# Altium PCB DriverV2.0.PcbDoc
Units mil, origin at the board's own origin, x right, y up, seen from the top; angles counter-clockwise.
Board outline 2047.24 x 1968.5 mil, 4 copper layers (Top, Gnd, Signal, Bottom), stack 58.4 mil thick; 73 components, 33 nets, 277 pads, 509 vias.
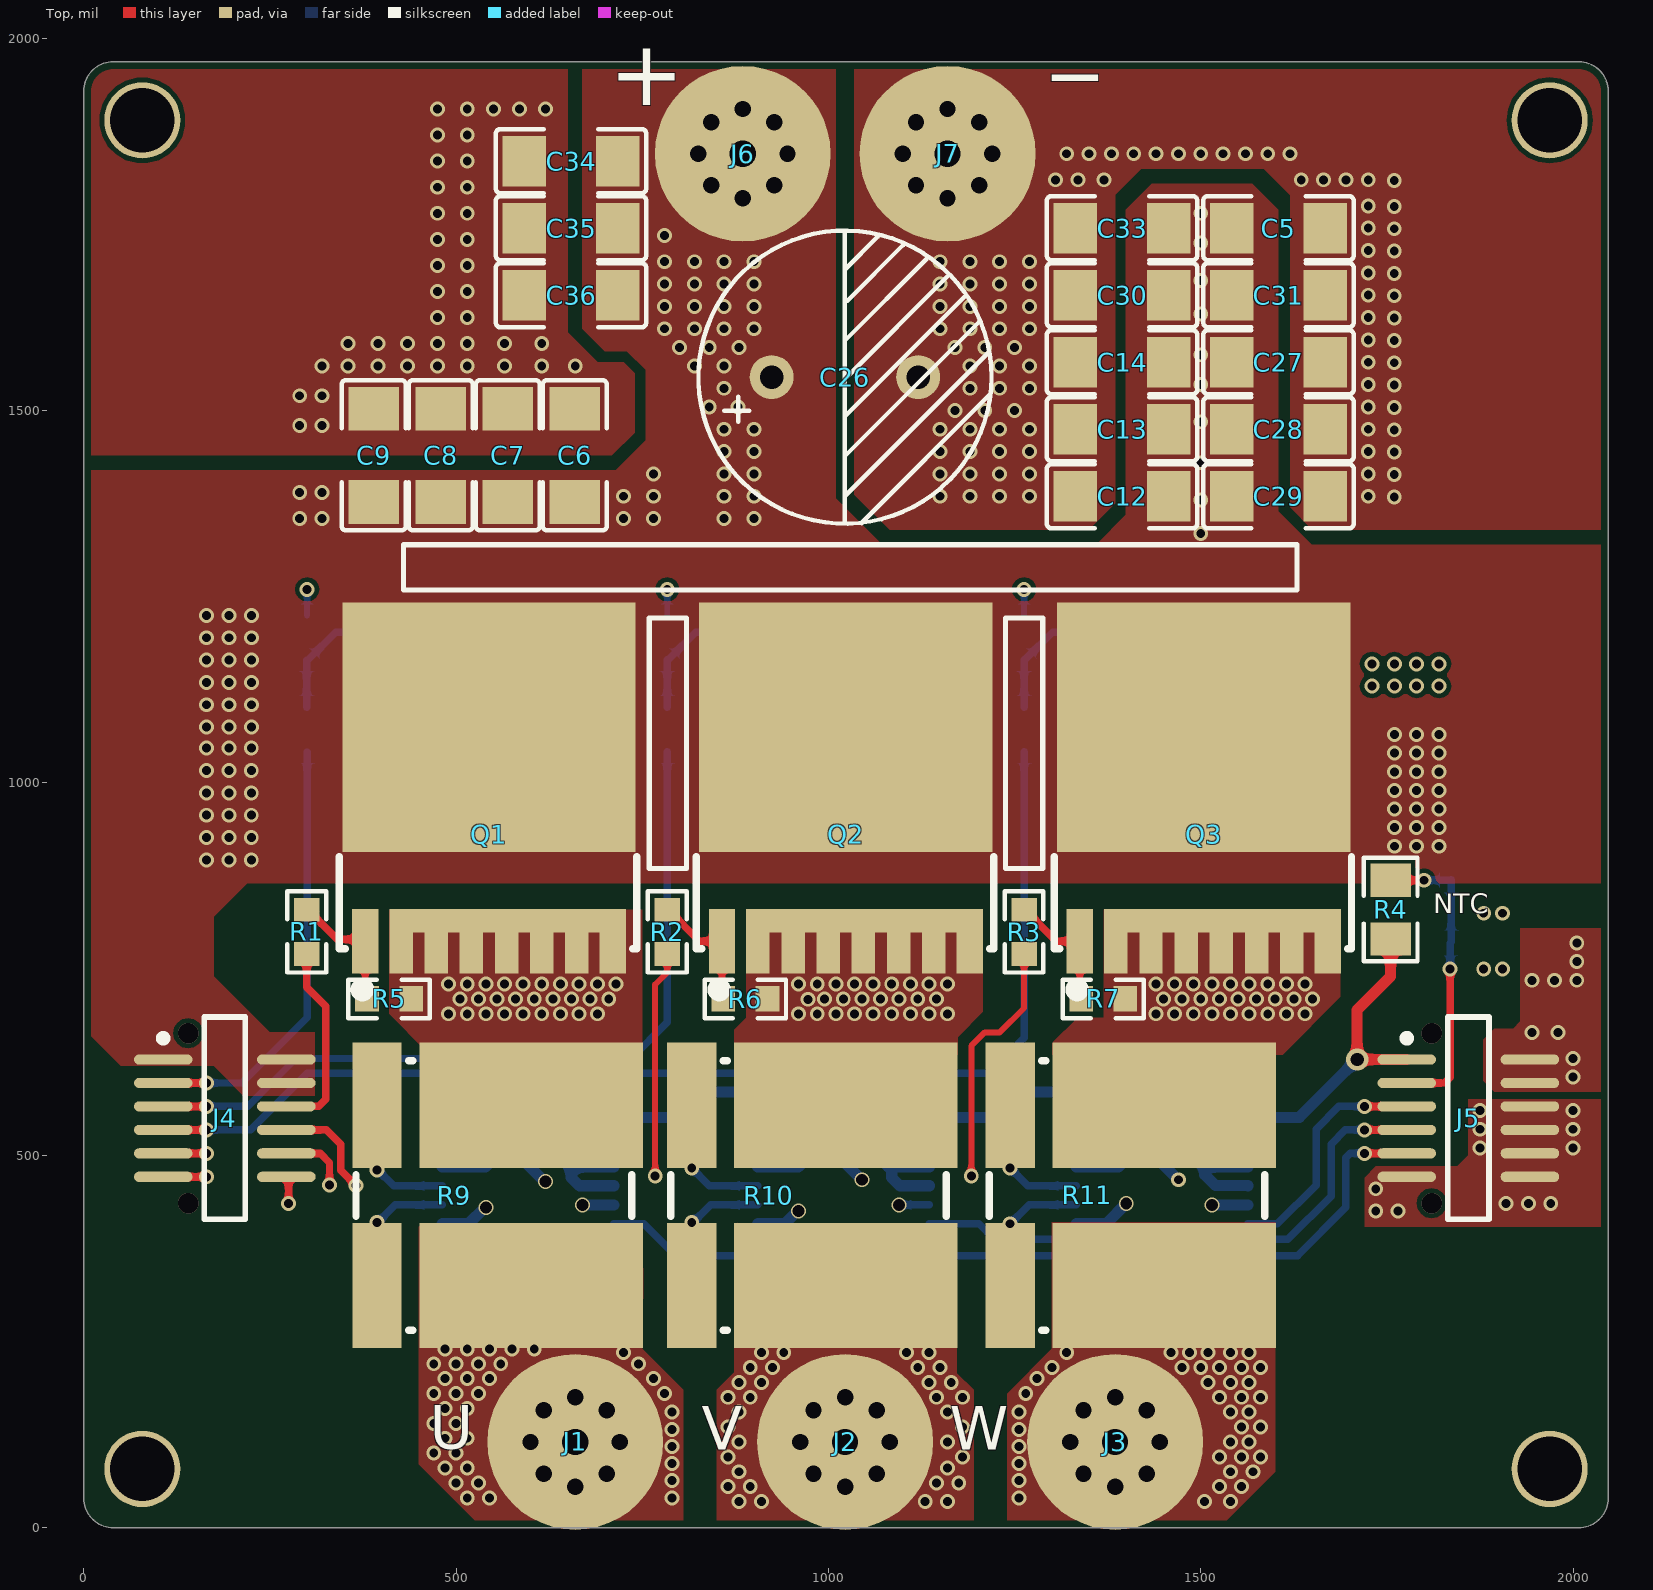
[diagram p0: Top view]
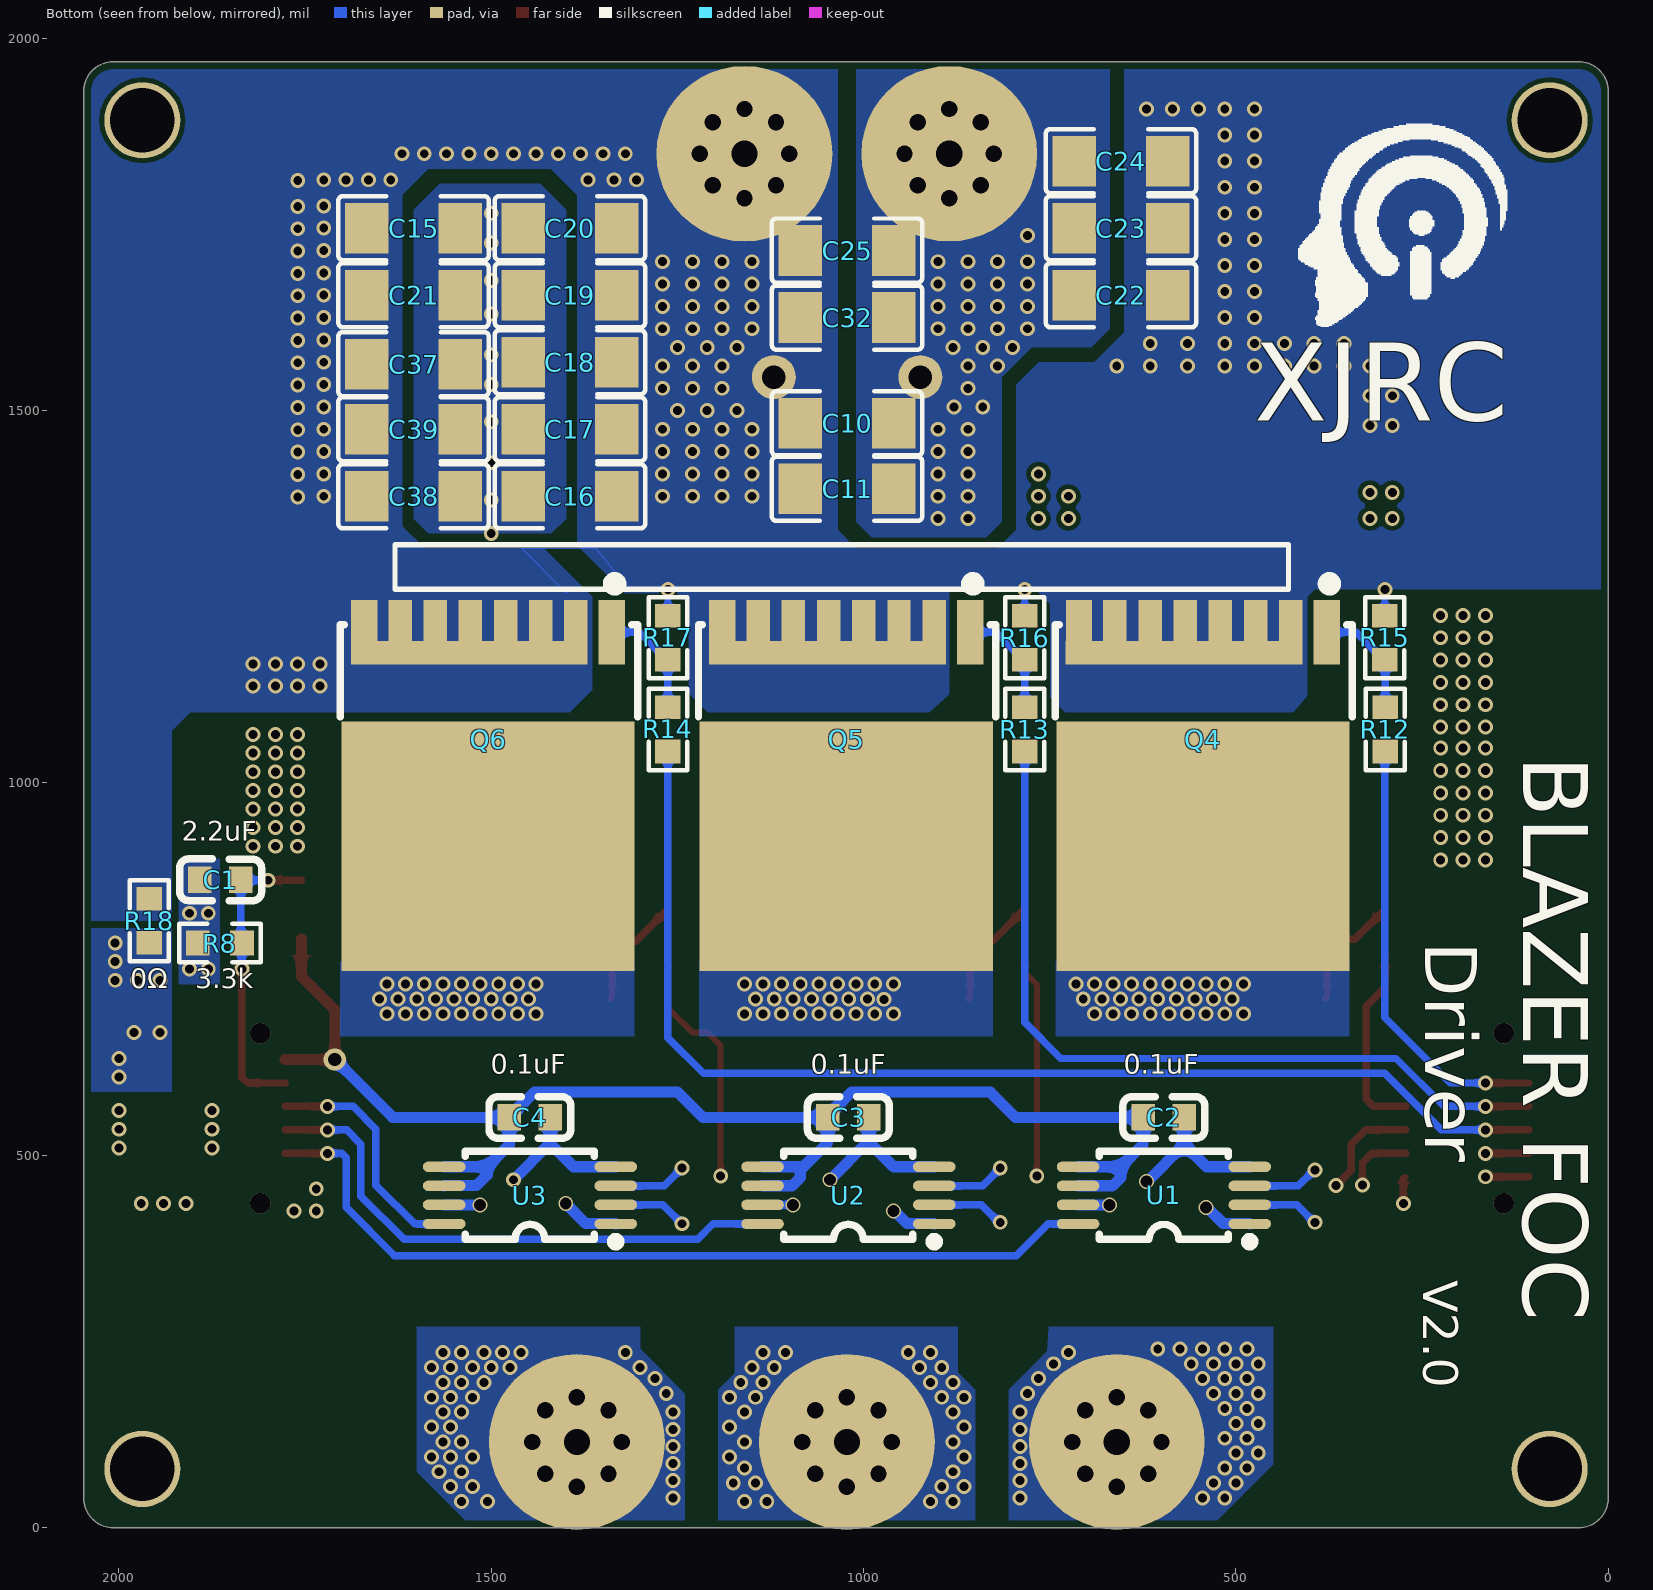
[diagram p1: Bottom view, seen from below]
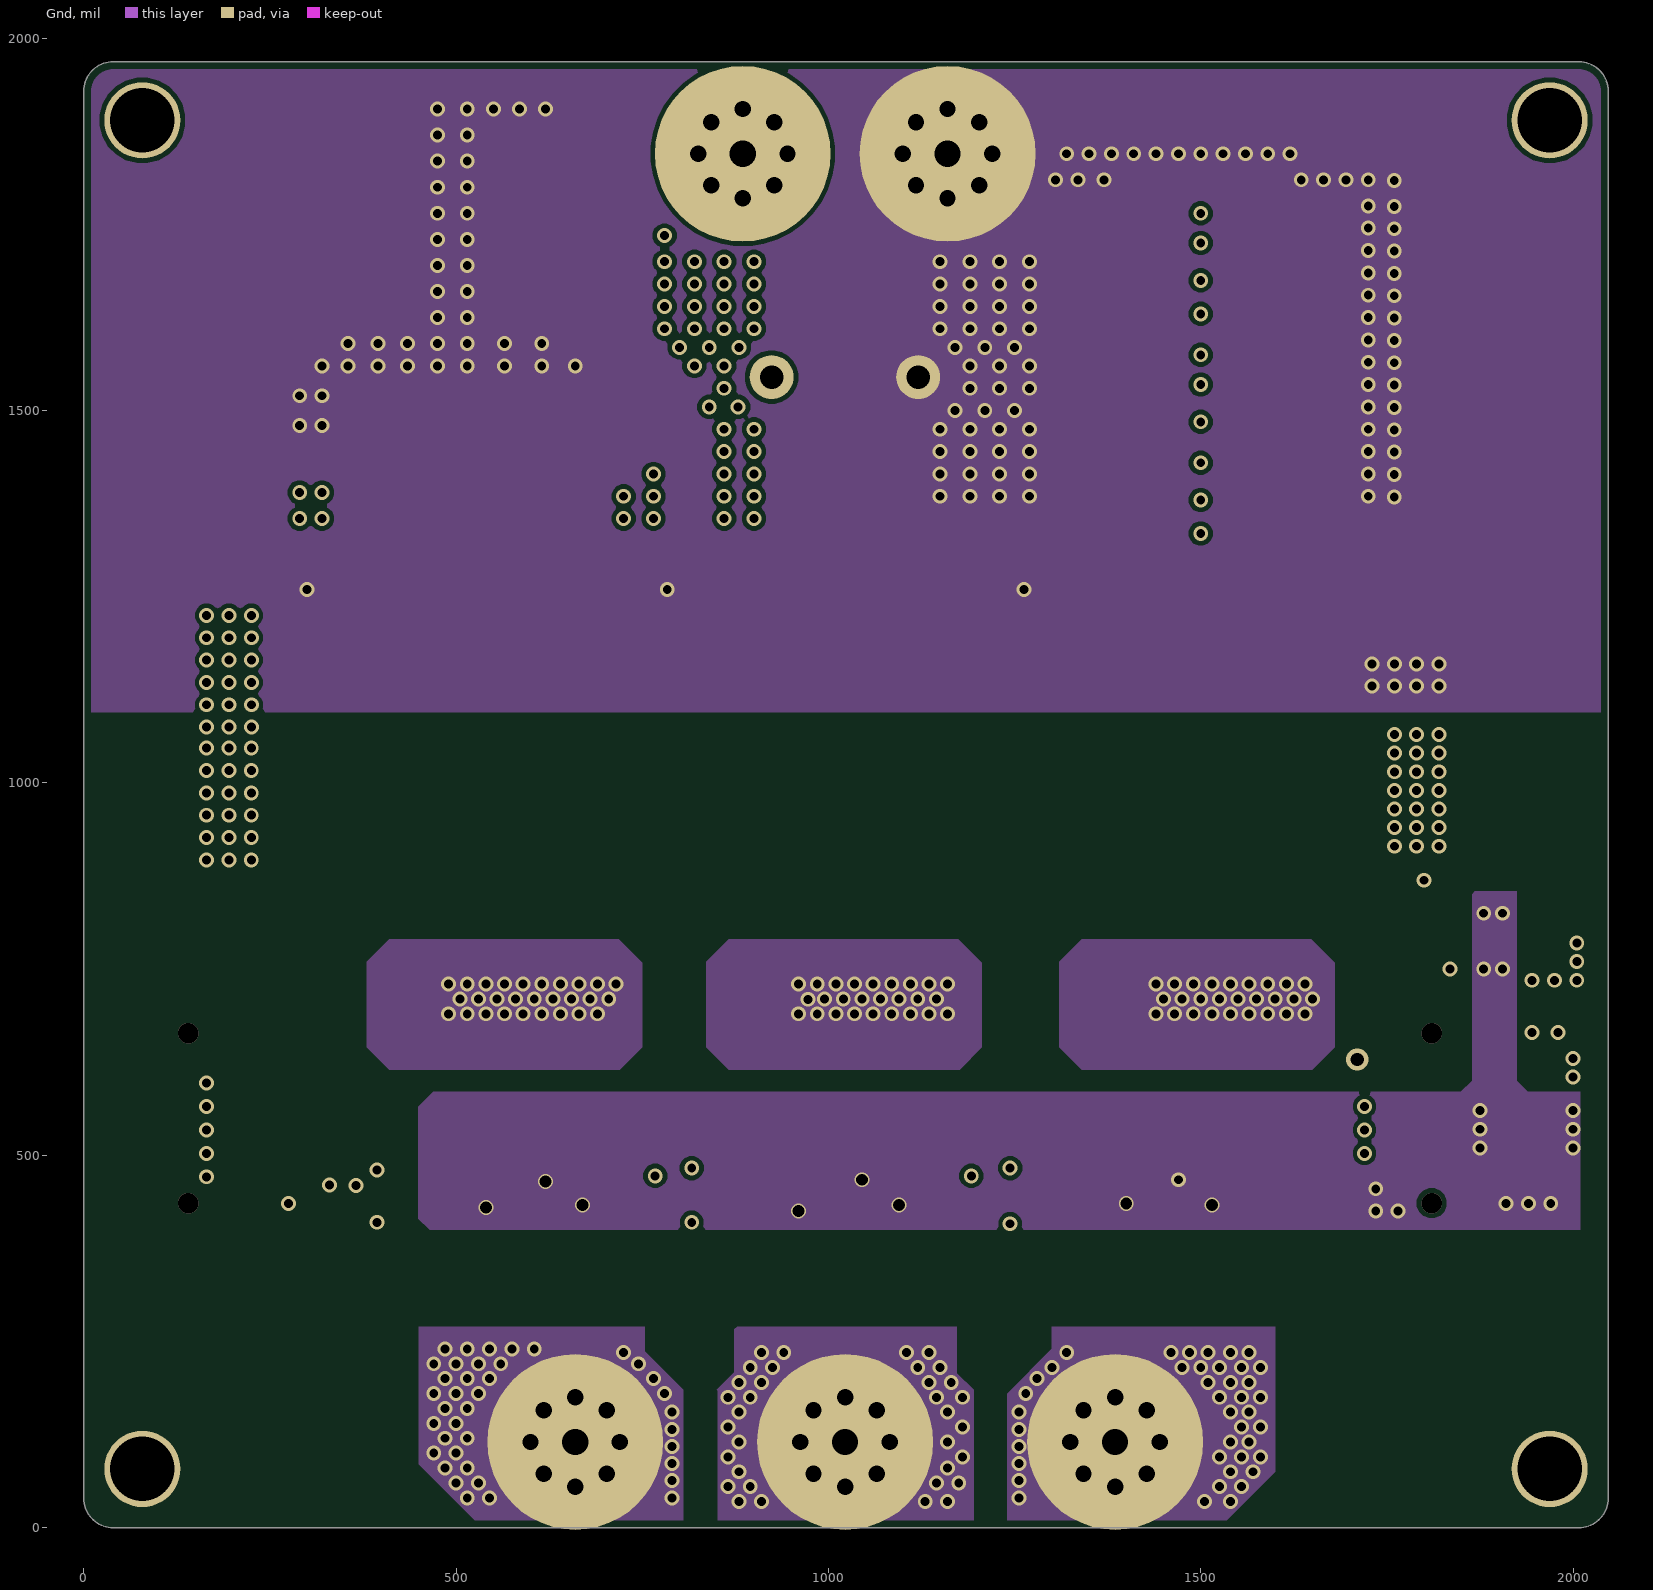
[diagram p2: Gnd]
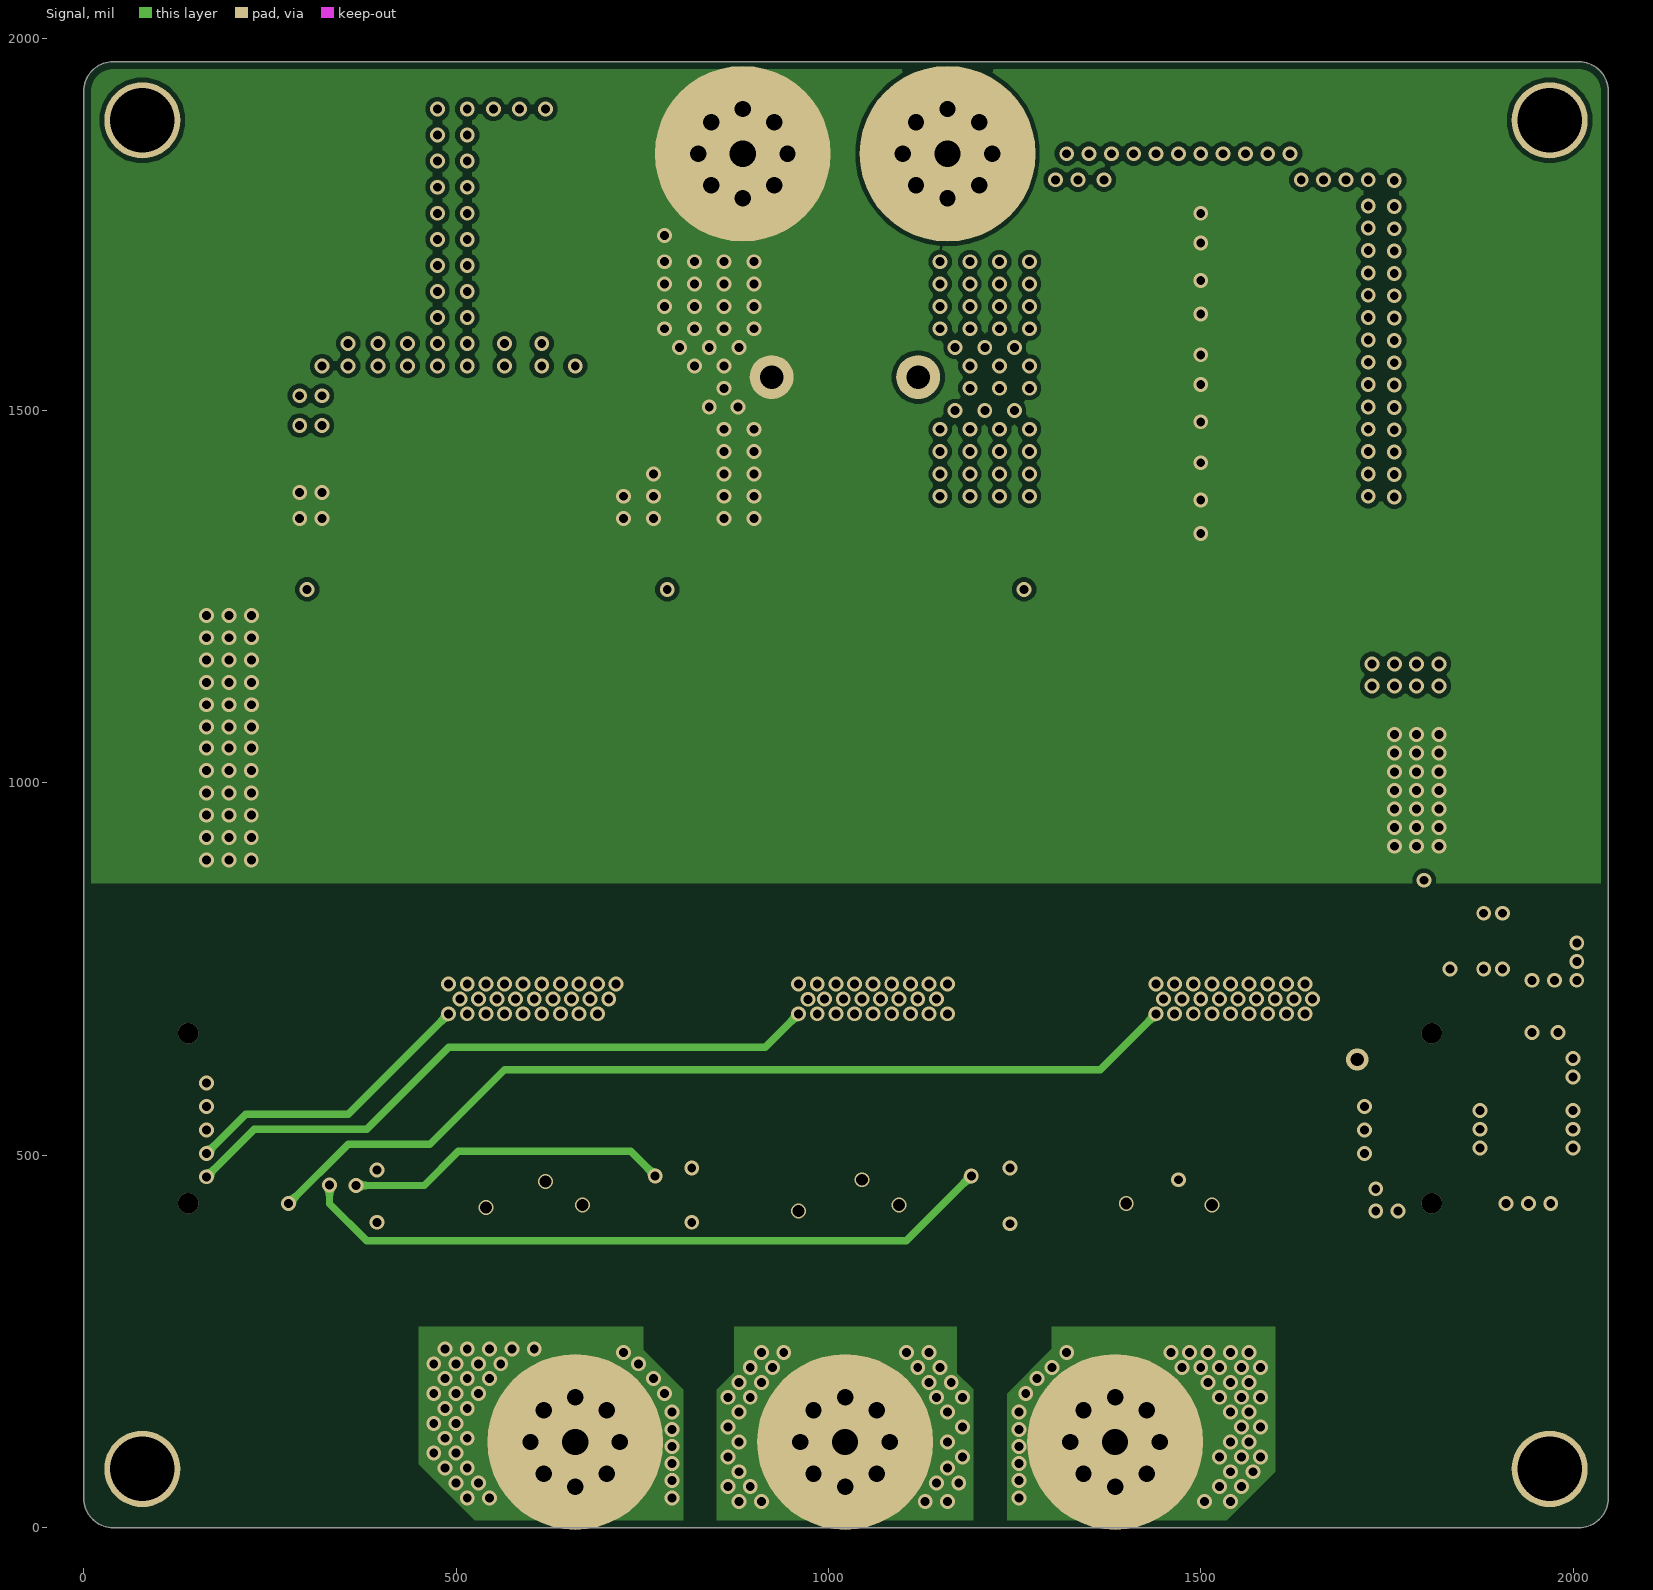
[diagram p3: Signal]
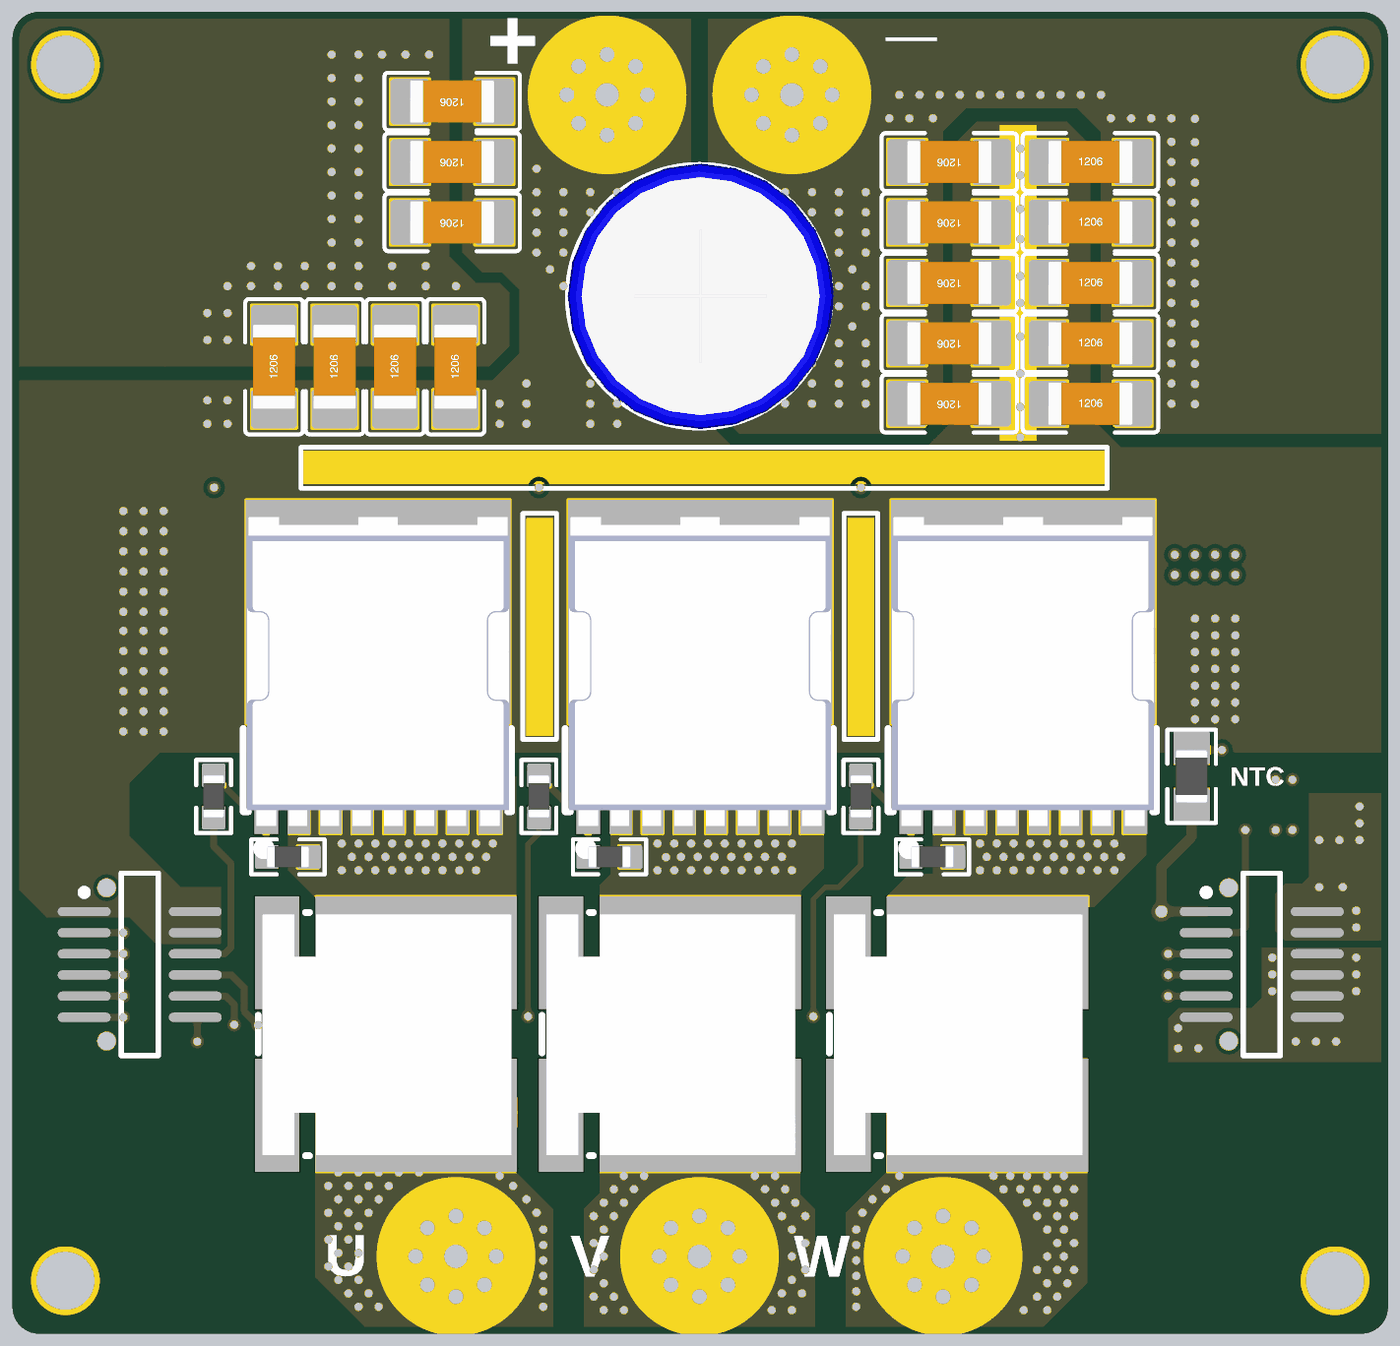
[diagram p4: 3D render of the assembled board from above, using the file's embedded part models]
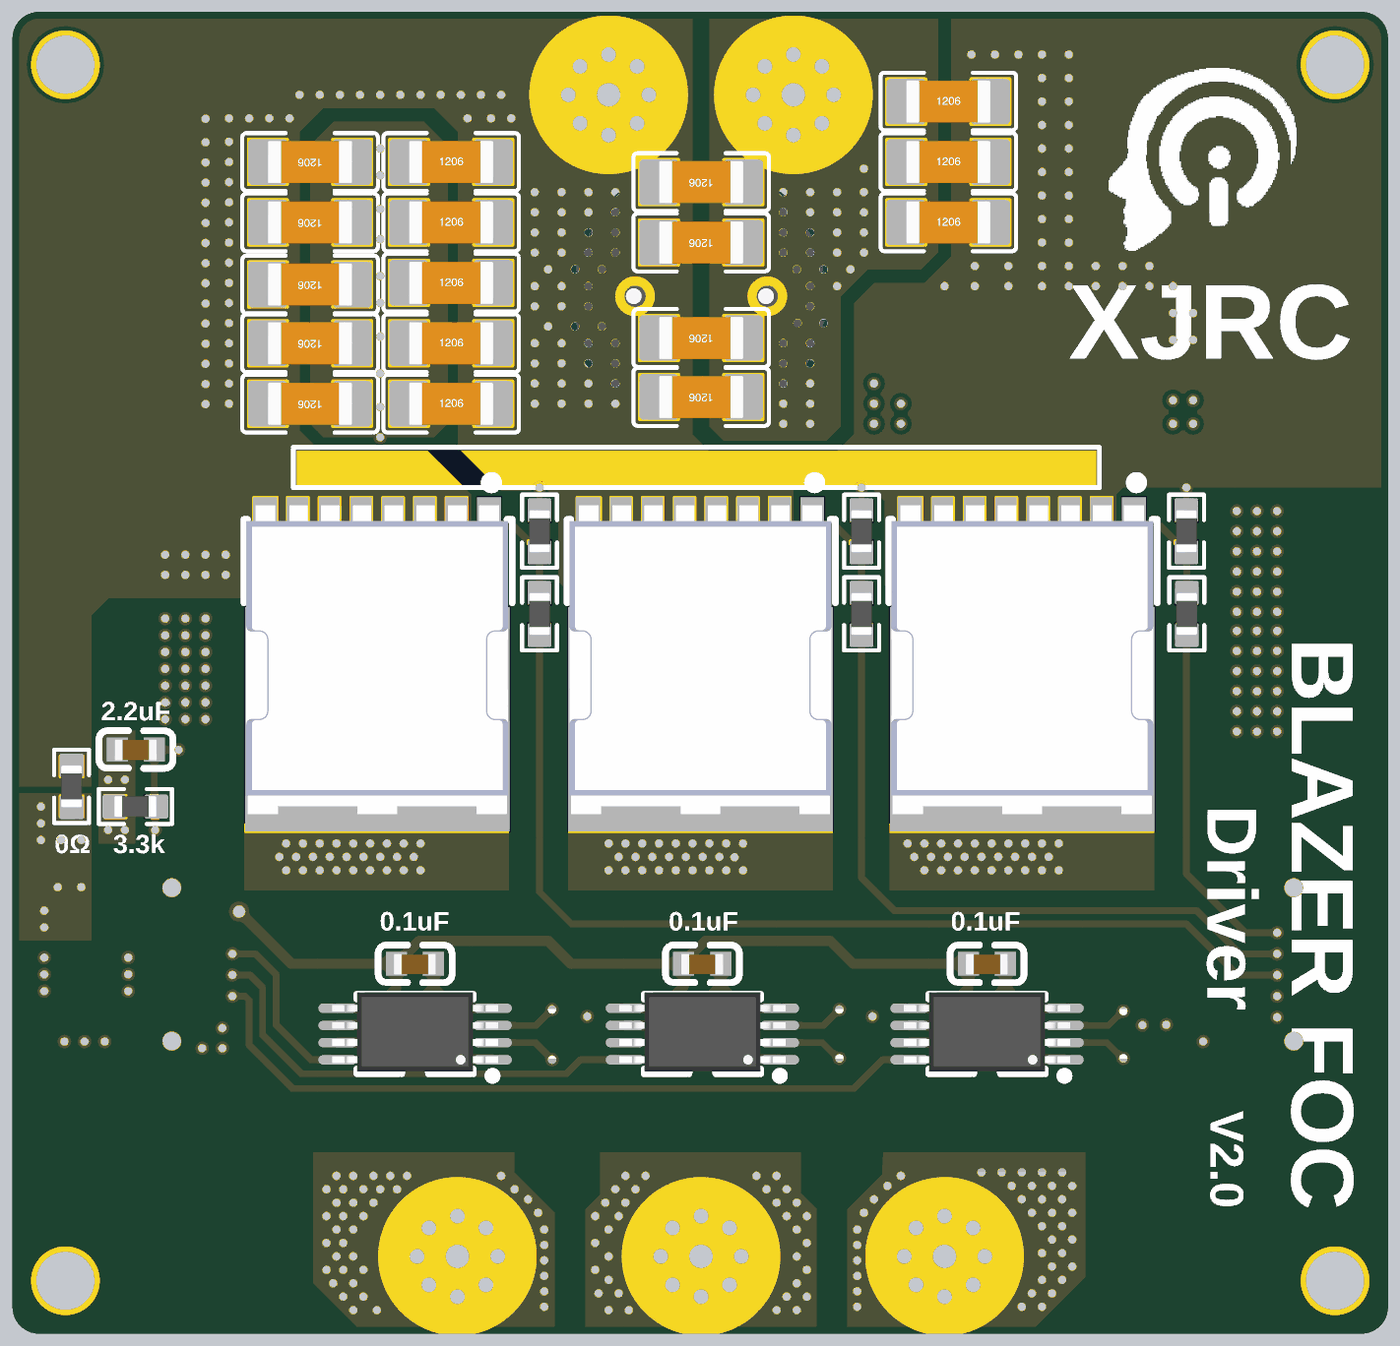
[diagram p5: 3D render of the assembled board from below, using the file's embedded part models]

## Layer stack, top to bottom
Top Solder: solder mask 0.4, Solder Resist, Dk 3.5
Top: signal copper 1.4
Dielectric 2: prepreg 2.8, PP-006, Dk 4.1
Gnd: signal copper 1.378
Dielectric 1: dielectric 47.2441, FR-4, Dk 4.8
Signal: signal copper 1.378
Dielectric 3: prepreg 2.8, PP-006, Dk 4.1
Bottom: signal copper 1.4
Bottom Solder: solder mask 0.4, Solder Resist, Dk 3.5

## Board outline
0,39.37 ccw(c39.37,39.37) 39.37,0 2007.87,0 ccw(c2007.87,39.37) 2047.24,39.37 2047.24,1929.13 ccw(c2007.87,1929.13) 2007.87,1968.5 39.37,1968.5 ccw(c39.37,1929.13) 0,1929.13

## Design rules (kind name [scope] priority, off if disabled: settings)
BoardOutlineClearance [All] p1: gap=0 ignorepadtopadclearanceinfootprint=FALSE except(10: Poly-OutlineEdge)
Clearance [All] p1: gap=6 ignorepadtopadclearanceinfootprint=FALSE except(4: Arc-Arc Arc-Track Track-Track)
ComponentClearance [All] p1: gap=0 collisioncheckmode=3 verticalgap=0 showdistances=FALSE
Height [All] p1: minheight=0 maxheight=2000 prefheight=500
HoleSize [All] p1: absolutevalues=TRUE maxlimit=500 minlimit=1 maxpercent=80.000 minpercent=20.000
HoleToHoleClearance [All] p1: gap=0 allowstackedmicrovias=TRUE
MinimumSolderMaskSliver [All] p1: minsoldermaskwidth=0
PolygonConnect PolygonConnect_PGND [InNet('PGND')] p1: connectstyle=Direct reliefconductorwidth=10 reliefentries=4 polygonreliefangle="90 Angle" airgapwidth=10
PolygonConnect [All] p2: connectstyle=Direct reliefconductorwidth=10 reliefentries=4 polygonreliefangle="90 Angle" airgapwidth=10
RoutingVias [All] p1: holewidth=12 width=24 viastyle="Through Hole" minholewidth=10 minwidth=10 maxholewidth=30 maxwidth=50
SilkToSilkClearance [All] p1: silktosilkclearance=0
SilkToSolderMaskClearance [IsPad] p1: minsilkscreentomaskgap=0 clearancetoexposedcopper=TRUE
SolderMaskExpansion [IsVia] p1: expansion=4 istentingtop=TRUE
Width [All] p1: maxlimit=100 minlimit=6 preferedwidth=10
23 further rules are at their usual default settings.

## Components (designator, comment, footprint, x,y, rotation, side; value= is the part's Value field where it differs from the comment)
C1 "2.2uf" 0603C 1863.76,870 r0 bottom
C2 "0.1uf" 0603C 597.04,550.85 r0 bottom
C3 "0.1uf" 0603C 1020.7,550.85 r0 bottom
C4 "0.1uf" 0603C 1448.34,550.85 r0 bottom
C5 "10uf" 1206C 1604.37,1745 r0 top
C6 "10uf" 1206C 659.37,1440 r90 top
C7 "10uf" 1206C 569.37,1440 r90 top
C8 "10uf" 1206C 479.37,1440 r90 top
C9 "10uf" 1206C 389.37,1440 r90 top
C10 "10uf" 1206C 1022.21,1482.87 r0 bottom
C11 "10uf" 1206C 1022.21,1395 r0 bottom
C12 "10uf" 1206C 1394.37,1385 r180 top
C13 "10uf" 1206C 1394.37,1475 r180 top
C14 "10uf" 1206C 1394.37,1565 r180 top
C15 "10uf" 1206C 1604.37,1745 r0 bottom
C16 "10uf" 1206C 1394.37,1385 r180 bottom
C17 "10uf" 1206C 1394.37,1475 r180 bottom
C18 "10uf" 1206C 1394.37,1565 r180 bottom
C19 "10uf" 1206C 1394.37,1655 r180 bottom
C20 "10uf" 1206C 1394.37,1745 r180 bottom
C21 "10uf" 1206C 1604.37,1655 r0 bottom
C22 "10uf" 1206C 654.37,1655 r180 bottom
C23 "10uf" 1206C 654.37,1745 r180 bottom
C24 "10uf" 1206C 654.37,1835 r180 bottom
C25 "10uf" 1206C 1022.21,1715 r0 bottom
C26 "220uf" ELECTRO10-5-N 923.78,1545 r0 top
C27 "10uf" 1206C 1604.37,1565 r0 top
C28 "10uf" 1206C 1604.37,1475 r0 top
C29 "10uf" 1206C 1604.37,1385 r0 top
C30 "10uf" 1206C 1394.37,1655 r180 top
C31 "10uf" 1206C 1604.37,1655 r0 top
C32 "10uf" 1206C 1022.21,1625 r0 bottom
C33 "10uf" 1206C 1394.37,1745 r180 top
C34 "10uf" 1206C 654.37,1835 r180 top
C35 "10uf" 1206C 654.37,1745 r180 top
C36 "10uf" 1206C 654.37,1655 r180 top
C37 "10uf" 1206C 1604.37,1562.5 r0 bottom
C38 "10uf" 1206C 1604.37,1385 r0 bottom
C39 "10uf" 1206C 1604.37,1475 r0 bottom
J1 "Pad" PAD 660,115 r0 top
J2 "Pad" PAD 1022.43,115 r0 top
J3 "Pad" PAD 1385,115 r0 top
J4 "BTB-2X6-M" BTB-M-0.8mm-2x6P 189.37,549.84 r0 top
J5 "BTB-2X6-M" BTB-M-0.8mm-2x6P 1859.37,549.84 r0 top
J6 "Pad" PAD 885,1845 r0 top
J7 "Pad" PAD 1160,1845 r0 top
Q1 "HYG006N04LS1TA" TOLL 544.18,931.14 r0 top
Q2 "HYG006N04LS1TA" TOLL 1023.39,931.14 r0 top
Q3 "HYG006N04LS1TA" TOLL 1504.06,931.14 r0 top
Q4 "HYG006N04LS1TA" TOLL 544.37,1058.7 r0 bottom
Q5 "HYG006N04LS1TA" TOLL 1023.31,1058.7 r0 bottom
Q6 "HYG006N04LS1TA" TOLL 1504.37,1058.7 r0 bottom
R1 "2.2R" 0603R 299.37,800 r90 top
R2 "2.2R" 0603R 783.58,800 r90 top
R3 "2.2R" 0603R 1262.8,800 r90 top
R4 "NTC 10k" 0805R 1755,830 r270 top
R5 "10k" 0603R 410,710 r180 top
R6 "10k" 0603R 888.53,710 r180 top
R7 "10k" 0603R 1369.19,710 r180 top
R8 "3.3k" 0603R 1864.37,785 r180 bottom
R9 "1mR" 3637R 497.47,446.1 r90 top value=10mΩ
R10 "1mR" 3637R 920,446.1 r90 top value=10mΩ
R11 "1mR" 3637R 1347.64,446.1 r90 top value=10mΩ
R12 "2.2R" 0603R 299.37,1071.89 r90 bottom
R13 "2.2R" 0603R 783.58,1071.89 r90 bottom
R14 "2.2R" 0603R 1262.8,1071.89 r90 bottom
R15 "10k" 0603R 300,1195 r270 bottom
R16 "10k" 0603R 783.58,1195 r270 bottom
R17 "10k" 0603R 1262.8,1195 r270 bottom
R18 "0R" 0603R 1959.37,815 r270 bottom
U1 "INA240A1PWR" TSSOP-8 596.73,446.18 r90 bottom
U2 "INA240A1PWR" TSSOP-8 1020.4,446.18 r90 bottom
U3 "INA240A1PWR" TSSOP-8 1448.04,446.18 r90 bottom

## Footprints (in the part's own frame and the unit in brackets; to place one, negate y for a bottom-side part, rotate by r counter-clockwise, add the part's x,y. Pads: shape width x height; smd on the part's side, far side on the other; paste and mask are expansions set on the pad)
0603C [mm]
  rect 0.8x0.9 smd: 1(-0.7,0) 2(0.7,0)
  silkscreen extent -1.41,-0.71 1.39,0.72, body extent -0.8,-0.38 0.8,0.42, height 0.6
0603R [mil]
  rect 31.75x34.02 smd paste-3937.01 mask+2: 1(-29.66,0) 2(29.66,0)
  silkscreen extent -55,-26 55,26, body extent -31,-16 31,16, height 15
0805R [mm]
  rect 1.133x1.377 smd paste-100 mask+0.051: 1(-1,0) 2(1,0)
  silkscreen extent -1.76,-0.92 1.76,0.92, body extent -1,-0.6 1,0.6, height 0.5
1206C [mm]
  rect 1.485x1.728 smd paste-100 mask+0.051: 1(-1.593,0) 2(1.593,0)
  silkscreen extent -2.56,-1.09 2.56,1.09, body extent -1.6,-0.81 1.6,0.81, height 1.21
3637R [mm]
  rect 4.27x1.68 smd paste+0 mask+0.05: 1(-3.075,2.63) 2(3.075,2.63)
  rect 4.27x7.62 smd paste+0 mask+0.05: 3(-3.075,-2.63) 4(3.075,-2.63)
  silkscreen extent -4.6,-6.05 4.6,3.35, body extent -4.57,-6.23 4.53,3.18, height 1.35
BTB-M-0.8mm-2x6P [mm] "0.8间距2x6P公座，SMD"
  oval 2x0.35 smd: 1(-2.1,2) 2(-2.1,1.2) 3(-2.1,0.4) 4(-2.1,-0.4) 5(-2.1,-1.2) 6(-2.1,-2) 7(2.1,-2) 8(2.1,-1.2) 9(2.1,-0.4) 10(2.1,0.4) 11(2.1,1.2) 12(2.1,2)
  silkscreen extent -2.22,-3.45 0.7,3.45, body extent -1.1,-3.45 1.1,3.45, height 2
ELECTRO10-5-N [mm]
  round 1.5 hole 0.8: 1(0,0) 2(5,0)
  silkscreen extent -2.5,-5 7.5,5, body extent -2.48,-5.03 7.58,5.03, height 12.78
PAD [mil] "Connector; Header; 3x2 Position"
  round 22 hole 22: 1(-60,0) 1(-42.43,-42.43) 1(-42.43,42.43) 1(0,-60) 1(0,60) 1(42.43,-42.43) 1(42.43,42.43) 1(60,0)
  round 236.22 hole 35: 1(0,0)
TOLL [mm]
  rect 0.9x2.2 smd paste-100 mask+0.05: 1(-4.225,-3.65) 8(4.225,-3.65)
  rect 0.8x2.2 smd paste-100 mask+0.05: 2(-3,-3.65) 3(-1.8,-3.65) 4(-0.6,-3.65) 5(0.6,-3.65) 6(1.8,-3.65) 7(3,-3.65)
  rect 8.08x0.8 smd paste-100 mask+0.05: 8(0.64,-2.95)
  rect 10x8.5 smd paste-100 mask+0.05: 9(0,3.65)
  silkscreen extent -5.1,-5.5 5.04,-0.76, body extent -4.95,-4.44 4.95,7.24, height 2.32
TSSOP-8 [mil]
  oval 13.9x57.24 smd: 1(-38.39,-115.24) 2(-12.79,-115.24) 3(12.8,-115.24) 4(38.39,-115.24) 5(38.39,115.24) 6(12.8,115.24) 7(-12.79,115.24) 8(-38.39,115.24)
  silkscreen extent -68,-121 59,87, body extent -56,-124 62,124, height 43

## Part data
C1 C2 C3 C4 C5 C6 C7 C8 C9 C10 C11 C12 C13 C14 C15 C16 C17 C18 C19 C20 C21 C22 C23 C24 C25 C27 C28 C29 C30 C31 C32 C33 C34 C35 C36 C37 C38 C39: library part CAP, "贴片电容"
C26: library part CAP+, "极性电容"
J1 J2 J3 J6 J7: "焊盘"
J4 J5: "0.8间距2x6P公座"
Q1 Q2 Q3 Q4 Q5 Q6: "N沟道增强型MOS 40V-600A", Continuous Drain Current (Id)=600A, Drain Source On Resistance (RDS(on)@Vgs,Id)=0.45mΩ@10V,80A, Drain Source Voltage (Vdss)=40V, Gate Threshold Voltage (Vgs(th)@Id)=1.8V@250uA, Input Capacitance (Ciss@Vds)=15.4nF@25V, JLCPCB Part Class=扩展库, LCSC Part Name="N沟道 40V 600A", Manufacturer=HUAYI(华羿微), Operating Temperature=-55℃~+175℃@(Tj), Power Dissipation (Pd)=428W, Reverse Transfer Capacitance (Crss@Vds)=115pF@25V, Add into BOM=yes, Convert to PCB=yes, Datasheet=https://atta.szlcsc.com/upload/public/pdf/source/20220321/91BDC8248F772C15069ACBA52C025F8E.pdf, Device=HYG006N04LS1TA, Manufacturer Part=HYG006N04LS1TA, Supplier=LCSC, Supplier Footprint=TOLL, Supplier Part=C2982928, Symbol=HYG006N04LS1TA, Total Gate Charge (Qg@Vgs)=230nC@10V, Type=N沟道
R1 R2 R3 R5 R6 R7 R8 R12 R13 R14 R15 R16 R17 R18: library part RES, "贴片电阻"
R4: library part RT, "热敏电阻"
R9 R10 R11: library part HoLR3637, "四脚采样电阻", JLCPCB Part Class=扩展库, LCSC Part Name="10mΩ ±1% 5W", Manufacturer=Milliohm(毫欧), Manufacturer Part=HoLR3637-5-R010-F, Power(Watts)=5W, Rated Current=-, Temperature Coefficient=±75ppm/℃, Tolerance=±1%, Add into BOM=yes, Convert to PCB=yes, Datasheet=https://atta.szlcsc.com/upload/public/pdf/source/20220606/90C34D3995A0A0E7F0B2BF3C5137C45B.pdf, Device=HoLR3637-5-R010-F, Mounting Sytle=-, Rated Output Voltage=-, Supplier=LCSC, Supplier Footprint=3637, Supplier Part=C3024469, Symbol=HOLR3637-5-R010-F, Type=-
U1 U2 U3: JLCPCB Part Class=扩展库, Manufacturer=TI(德州仪器), Operating Temperature=-40℃~+125℃, Supply Current=1.8mA, Add into BOM=yes, Convert to PCB=yes, Datasheet=https://www.ti.com/cn/lit/gpn/ina240, Device=INA240A1PWR, LCSC Part Name=INA240A1PWR, Manufacturer Part=INA240A1PWR, Name=INA240A1PWR, Number of Channels=1, Supplier=LCSC, Supplier Footprint=TSSOP-8, Supplier Part=C93965, Symbol=INA240A1PWR

## Free pads (board coordinates)
  round 102.36 hole 86.61: 8(78.74,78.74) 8(78.74,1889.76) 8(1968.5,78.74) 8(1968.5,1889.76)

## Via types
v1: diameter 20, hole 12, Top to Bottom, tented both sides, 496 vias
v2: diameter 20, hole 16, Top to Bottom, tented both sides, 8 vias
v3: diameter 27.56, hole 27.56, Top to Bottom, tented both sides, 4 vias
v4: diameter 30, hole 18, Top to Bottom, tented both sides, 1 vias

## Nets (pads, with @x,y where several pads share a name; then routed paths per layer and width w, separated by ;. In a path a pad name is that pad's centre, name@x,y a point inside that pad or via, vN(x,y) a via of type N, cw(c..) or ccw(c..) an arc to the next point about the centre after c; other vN are vias at no path point)
A_N: R9.2 U1.3 | length 96.3
  Bottom w10: v1@394.26,480.74 416.02,458.98 U1.3
  other v1: 393.93,480.42
A_P: R9.1 U1.2 | length 92.4
  Bottom w10: v1@397.67,412.67 418.39,433.39 U1.2
  other v1: 393.93,410
AGND: C1.2 C2.1 C3.1 C4.1 J5.6 J5.7 J5.8 J5.9 J5.10 R8.1 U1.1 U1.4 U1.7 U2.1 U2.4 U2.7 U3.1 U3.4 U3.7 | length 960.1
  Bottom w10: v2(1095,433.39) U2.7
  Bottom w15: U1.1 482.04,408.34 516.99,408.34 538.65,430 v2(540,430) ; U1.4 539.57,484.57 569.48,514.48 ; C2.1 569.48,514.48 ; v2(620,465) 618.95,465 569.48,514.48 ; v2(670,433.39) U1.7 ; U2.1 905.71,408.34 941.9,408.34 958.65,425.09 v2(960,425.09) ; U2.4 959.57,484.57 993.14,518.14 C3.1 ; 993.14,518.97 v2(1045,467.11) ; U3.1 1333.35,408.34 1373.34,408.34 v2(1400,435) ; U3.4 1389.57,484.57 1420.91,515.91 C4.1@1420.91,550.72 ; 1420.91,516.2 v1(1470,467.11) ; v2(1515,433.39) U3.7
  other v1: 1735,425 1765,425 1910,435 1940,435 1970,435 1735,455 1875,510 2000,510 1875,535 2000,535 1875,560 2000,560 1880,750 1905,750 1880,825 1905,825
AVCC: C2.2 C3.2 C4.2 J5.1 R4.2 U1.5 U1.6 U2.5 U2.6 U3.5 U3.6 | length 2054
  Top w15: R4.2 1755,740 1710,695 v4(1710,628.58) J5.1
  Bottom w15: U1.6 666.02,458.98 654.62,470.38 654.62,484.57 ; U1.5 654.62,484.57 ; U2.6 1096.02,458.98 1085,470 1085,480 1089.57,484.57 ; U2.5 1089.57,484.57 ; U3.6 1562.72,459.53 1519.68,459.53 1505.43,473.79 1505.43,484.57 ; U3.5 1505.43,484.57 ; v4(1710,628.58) 1632.27,550.85 C4.2 ; 654.62,484.57 624.6,514.6 C2.2 795.85,550.85 830,585 1016.08,585 1048.26,552.82 C3.2 ; C3.2 1048.26,516.74 1080.43,484.57 1089.57,484.57 ; C3.2 1215.35,550.85 1215.6,550.6 1250,585 1441.75,585 1465.68,561.07 1467.65,561.07 1475.9,552.82 C4.2 ; C4.2 1475.9,514.1 1505.43,484.57
B_N: R10.2 U2.3 | length 98.6
  Bottom w10: v1(816.45,482.76) 840.23,458.98 U2.3
B_P: R10.1 U2.2 | length 98.4
  Bottom w10: v1(816.45,410) 818.42,410 841.81,433.39 U2.2
C_N: R11.2 U3.3 | length 98.5
  Bottom w10: v1(1244.1,482.76) 1267.87,458.98 U3.3
C_P: R11.1 U3.2 | length 99.2
  Bottom w10: v1(1244.1,408.03) 1269.46,433.39 U3.2
DCBUS: C5.1 C6.1 C7.1 C8.1 C9.1 C10.1 C11.1 C12.1 C13.1 C14.1 C15.1 C16.1 C17.1 C18.1 C19.1 C20.1 C21.1 C22.1 C23.1 C24.1 C25.1 C26.1 C27.1 C28.1 C29.1 C30.1 C31.1 C32.1 C33.1 C34.1 C35.1 C36.1 C37.1 C38.1 C39.1 J4.1 J4.11 J4.12 J6.1 Q1.9 Q2.9 Q3.9
  other v1: 164.97,896.68 194.97,896.68 224.97,896.68 1760,915 1790,915 1820,915 164.97,926.68 194.97,926.68 224.97,926.68 1760,940 1790,940 1820,940 164.97,956.68 194.97,956.68 224.97,956.68 1760,965 1790,965 1820,965 164.97,986.68 194.97,986.68 224.97,986.68 1760,990 1790,990 1820,990 1760,1015 1790,1015 1820,1015 164.97,1016.68 194.97,1016.68 224.97,1016.68 1760,1040 1790,1040 1820,1040 164.97,1046.68 194.97,1046.68 224.97,1046.68 1760,1065 1790,1065 1820,1065 165,1075 195,1075 225,1075 165,1105 195,1105 225,1105 165,1135 195,1135 225,1135 165,1165 195,1165 225,1165 165,1195 195,1195 225,1195 165,1225 195,1225 225,1225 1500,1335 290,1355 320,1355 725,1355 765,1355 860,1355 900,1355 1500,1380 725,1385 765,1385 860,1385 900,1385 290,1390 320,1390 765,1415 860,1415 900,1415 1500,1430 860,1445 900,1445 860,1475 900,1475 1500,1485 840,1505 878.78,1505 860,1530 1500,1535 820,1560 860,1560 1500,1575 800,1585 840,1585 880,1585 780,1610 820,1610 860,1610 900,1610 1500,1630 780,1640 820,1640 860,1640 900,1640 780,1670 820,1670 860,1670 900,1670 1500,1675 780,1700 820,1700 860,1700 900,1700 1500,1725 780,1735 1500,1765
GH_A: J4.10 R1.1 | length 262.6
  Top w10: J4.10 315.31,565.59 325,575.28 325,700 299.37,725.63 R1.1
GH_B: J4.9 R2.1 | length 884
  Top w8: v1(767.39,472.39) 767.39,729.28 783.58,745.47 R2.1
  Top w10: J4.9 325.91,534.09 345,515 345,480 v1(365.58,459.42)
  Signal w10: v1(365.58,459.42) 457.22,459.42 503.04,505.24 734.54,505.24 v1(767.39,472.39)
GH_C: J4.8 R3.1 | length 1371.5
  Top w8: v1@1191.88,476.88 1191.88,646.88 1210,665 1230,665 1262.8,697.8 R3.1
  Top w10: J4.8 317.4,502.6 330,490 v1(330,460)
  Signal w10: v1(330,460) 330,435 380,385 1104.49,385 v1(1191.88,472.39)
GL_A: J4.2 R12.1 | length 587.2
  Top w10: J4.2 v1(165,597.09)
  Bottom w8: R12.1 R12.1@300,1041.6
  Bottom w10: v1(165,597.09) 212.09,597.09 300,685 R12.1@300,1041.6
GL_B: J4.3 R13.1 | length 1087.3
  Top w10: J4.3 v1(165,565.59)
  Bottom w10: v1(165,565.59) 220.59,565.59 285,630 735,630 783.58,678.58 R13.1
GL_C: J4.4 R14.1 | length 1591.8
  Top w10: J4.4 v1(165,534.09)
  Bottom w10: v1(165,534.09) 224.09,534.09 300,610 1215,610 1262.8,657.8 R14.1
GND: J5.11 J5.12 R18.2
  other v1: 2000,605 2000,630 1945,665 1980,665 1945,735 1975,735 2005,735 2005,760 2005,785
NetQ1_1: Q1.1 R1.2 R5.2 | length 174.4
  Top w8: R1.2 R1.2@300.5,829.66 ; Q1.1@375.28,790 Q1.1 377.84,712.5 R5.2
  Top w10: R1.2@300.5,829.66 340.16,790 Q1.1@375.28,790
NetQ2_1: Q2.1 R2.2 R6.2 | length 169.2
  Top w8: R2.2 R2.2@784.72,829.66 ; Q2.1 857.06,711.81 R6.2
  Top w10: R2.2@784.72,829.66 826.94,787.44 Q2.1
NetQ3_1: Q3.1 R3.2 R7.2 | length 170.6
  Top w8: R3.2 R3.2@1263.93,829.66 ; Q3.1 1337.72,711.81 R7.2
  Top w10: R3.2@1263.93,829.66 1306.15,787.44 Q3.1
NetQ4_1: Q4.1 R12.2 R15.2 | length 157.4
  Bottom w8: R15.2@299.37,1164.71 R15.2 R15.2@301.13,1165.34
  Bottom w10: R12.2 R15.2@299.37,1164.71 ; R15.2@301.13,1165.34 338.19,1202.4 Q4.1
NetQ5_1: Q5.1 R13.2 R16.2 | length 152.5
  Bottom w8: R16.2 R16.2@784.72,1165.34
  Bottom w10: R13.2 R16.2 ; R16.2@784.72,1165.34 821.78,1202.4 Q5.1
NetQ6_1: Q6.1 R14.2 R17.2 | length 154.4
  Bottom w8: R17.2 R17.2@1263.93,1165.34
  Bottom w10: R14.2 R17.2 ; R17.2@1263.93,1165.34 1300.99,1202.4 Q6.1
PGND: C5.2 C6.2 C7.2 C8.2 C9.2 C10.2 C11.2 C12.2 C13.2 C14.2 C15.2 C16.2 C17.2 C18.2 C19.2 C20.2 C21.2 C22.2 C23.2 C24.2 C25.2 C26.2 C27.2 C28.2 C29.2 C30.2 C31.2 C32.2 C33.2 C34.2 C35.2 C36.2 C37.2 C38.2 C39.2 J7.1 Q4.2 Q4.3 Q4.4 Q4.5 Q4.6 Q4.7 Q4.8 Q5.2 Q5.3 Q5.4 Q5.5 Q5.6 Q5.7 Q5.8 Q6.2 Q6.3 Q6.4 Q6.5 Q6.6 Q6.7 Q6.8 R15.1 R16.1 R17.1 R18.1 | length 106
  Bottom w8: R15.1 v1(300,1260) ; R16.1 v1(783.58,1260) ; R17.1 v1(1262.8,1260)
  other v1: 1730,1130 1760,1130 1790,1130 1820,1130 1730,1160 1760,1160 1790,1160 1820,1160 1759.91,1384.27 1150,1385 1190,1385 1230,1385 1270,1385 1725,1385 1759.91,1414.27 1150,1415 1190,1415 1230,1415 1270,1415 1725,1415 1759.91,1444.27 1150,1445 1190,1445 1230,1445 1270,1445 1725,1445 1759.91,1474.27 1150,1475 1190,1475 1230,1475 1270,1475 1725,1475 290,1480 320,1480 1170,1500 1210,1500 1250,1500 1759.91,1504.27 1725,1505 290,1520 320,1520 1190,1530 1230,1530 1270,1530 1759.91,1534.27 1725,1535 320,1560 355,1560 395,1560 435,1560 475,1560 515,1560 565,1560 615,1560 660,1560 1190,1560 1230,1560 1270,1560 1759.91,1564.27 1725,1565 1170,1585 1210,1585 1250,1585 355,1590 395,1590 435,1590 475,1590 515,1590 565,1590 615,1590 1759.91,1594.27 1725,1595 1150,1610 1190,1610 1230,1610 1270,1610 1759.91,1624.27 475,1625 515,1625 1725,1625 1150,1640 1190,1640 1230,1640 1270,1640 1759.91,1654.27 1725,1655 475,1660 515,1660 1150,1670 1190,1670 1230,1670 1270,1670 1759.91,1684.27 1725,1685 475,1695 515,1695 1150,1700 1190,1700 1230,1700 1270,1700 1759.91,1714.27 1725,1715 475,1730 515,1730 1759.91,1744.27 1725,1745 475,1765 515,1765 1759.91,1774.27 1725,1775 475,1800 515,1800 1759.91,1809.27 1305,1810 1335,1810 1370,1810 1635,1810 1665,1810 1695,1810 1725,1810 475,1835 515,1835 1320,1845 1350,1845 1380,1845 1410,1845 1440,1845 1470,1845 1500,1845 1530,1845 1560,1845 1590,1845 1620,1845 475,1870 515,1870 475,1905 515,1905 550,1905 585,1905 620,1905
SH_A: J4.5 Q1.2 Q1.3 Q1.4 Q1.5 Q1.6 Q1.7 Q1.8 Q4.9 R5.1 R9.4 | length 460.9
  Top w10: J4.5 v1(165,502.6)
  Signal w10: v1(165,502.6) 217.4,555 355,555 v1(490,690)
  other v1: 515,690 540,690 565,690 590,690 615,690 640,690 665,690 690,690 505,710 530,710 555,710 580,710 605,710 630,710 655,710 680,710 705,710 490,730 515,730 540,730 565,730 590,730 615,730 640,730 665,730 690,730 715,730
SH_B: J4.6 Q2.2 Q2.3 Q2.4 Q2.5 Q2.6 Q2.7 Q2.8 Q5.9 R6.1 R10.4 | length 944
  Top w10: J4.6 v1(165,471.1)
  Signal w10: v1(165,471.1) 228.9,535 380,535 490,645 915,645 v1(960,690)
  other v1: 985,690 1010,690 1035,690 1060,690 1085,690 1110,690 1135,690 1160,690 972.6,709.49 995,710 1020,710 1045,710 1070,710 1095,710 1120,710 1145,710 960,730 985,730 1010,730 1035,730 1060,730 1085,730 1110,730 1135,730 1160,730
SH_C: J4.7 Q3.2 Q3.3 Q3.4 Q3.5 Q3.6 Q3.7 Q3.8 Q6.9 R7.1 R11.4 | length 1308.1
  Top w8: J4.7 272.33,471.1 J4.7@275,468.43
  Top w10: v1(275,435) J4.7@275,468.43
  Signal w10: v1(275,435) 355,515 465,515 565,615 1365,615 v1(1440,690)
  other v1: 1465,690 1490,690 1515,690 1540,690 1565,690 1590,690 1615,690 1640,690 1450,710 1475,710 1500,710 1525,710 1550,710 1575,710 1600,710 1625,710 1650,710 1440,730 1465,730 1490,730 1515,730 1540,730 1565,730 1590,730 1615,730 1640,730
SO_A: J5.5 U1.8 | length 1178.5
  Top w10: v1(1720,502.6) J5.5
  Bottom w10: U1.8 752.21,407.79 795,365 1630,365 1695,430 1695,496.74 1700.86,502.6 v1(1720,502.6)
SO_B: J5.4 U2.8 | length 751.6
  Top w10: v1(1720,534.09) J5.4
  Bottom w10: U2.8 1202.21,407.79 1222.97,387.03 1617.03,387.03 1675,445 1675,515 1694.09,534.09 v1(1720,534.09)
SO_C: J5.3 U3.8 | length 322.7
  Top w10: v1(1720,565.59) J5.3
  Bottom w10: U3.8 1602.79,407.79 1655,460 1655,535 1685.59,565.59 v1(1720,565.59)
TEMP_S: C1.1 J5.2 R4.1 R8.2 | length 408.8
  Top w10: R4.1 v1(1800,869.37) ; J5.2 1827.09,597.09 1835,605 v1(1835,750)
  Bottom w10: v1(1800,869.37) 1835.57,869.37 C1.1 1836.2,786.49 R8.2 1835,784.71 v1(1835,750)
U: J1.1 R9.3
  other v1: 515,40 545,40 790,40 500,60 530,60 790,63 485,80 515,80 790,86 470,100 500,100 790,109 485,120 515,120 790,132 470,140 500,140 790,155 485,160 515,160 470,180 500,180 530,180 780,180 485,200 515,200 545,200 765,200 470,220 500,220 530,220 560,220 745,220 725,235 485,240 515,240 545,240 575,240 605,240
V: J2.1 R10.3
  other v1: 880,35 910,35 1130,35 1160,35 865,55 895,55 1145,60 1175,60 880,75 1160,80 865,95 1180,95 880,115 1160,115 865,135 1180,135 880,155 1160,155 865,175 895,175 1145,175 1180,175 880,195 910,195 1135,195 1165,195 895,215 925,215 1120,215 1150,215 910,235 940,235 1105,235 1135,235
W: J3.1 R11.3
  other v1: 1505,35 1540,35 1255.82,40 1525,55 1555,55 1255.82,63 1540,75 1570,75 1255.82,86 1525,95 1555,95 1580,95 1255.82,109 1540,115 1565,115 1255.82,132 1555,135 1580,135 1255.82,155 1540,155 1565,155 1525,175 1555,175 1580,175 1265,180 1510,195 1540,195 1565,195 1280,200 1300,215 1475,215 1500,215 1525,215 1555,215 1580,215 1320,235 1460,235 1485,235 1510,235 1540,235 1565,235
copper on no net:
  other v3: 140.16,435.67 1810.16,435.67 140.16,664.02 1810.16,664.02

## Polygon pours and split planes (outlines as drawn)
DCBUS on Top "Top-DCBUS" (solid, remove dead copper, pour order 86): 0,670 50,620 174.37,620 214.37,580 310,580 310,665 250,665 174.37,740.63 174.37,820 219.37,865 2047.24,865 2047.24,1320 1649.37,1320 1604.37,1365 1604.37,1770 1569.37,1805 1434.37,1805 1399.37,1770 1399.37,1360 1359.37,1320 1072.54,1320 1010,1382.54 1010,1965 669.37,1965 669.37,1610 699.37,1580 729.37,1580 754.37,1555 754.37,1460 714.37,1420 0,1420 0,770
U on Top "U_L01_P109" (solid, remove dead copper, pour order 109): 451,408.9 450,407.9 450,85 535,0 805,0 805,185 749.82,240.18 751.47,329.15 750,408.67 749.88,408.79
W on Top "W_L01_P111" (solid, remove dead copper, pour order 111): 1300,410 1300,240 1240,180 1240,0 1525,0 1600,75 1600,410
V on Top "V_L01_P110" (solid, remove dead copper, pour order 110): 873.75,409.09 873.75,208.75 850,185 850,0 1200,0 1195,5 1195,185 1172.55,207.45 1172.55,407.78
SH_C on Top "SH_C_L01_P100" (solid, remove dead copper, pour order 100): 1370,830 1370,685 1335,685 1300.84,650.84 1300.84,635 1610,635 1687.58,712.58 1687.58,830
SH_B on Top "SH_B_L01_P099" (solid, remove dead copper, pour order 99): 890,830 890,685 873.68,668.68 873.68,635 1173.61,635 1173.61,658.61 1207.56,692.56 1207.56,830
SH_A on Top "SH_A_L01_P098" (solid, remove dead copper, pour order 98): 410,830 410,690 460,640 750,640 750,830
PGND on Top "Top -PGND" (solid, remove dead copper, pour order 23): 1420,1825 1584.37,1825 1620,1789.37 1620,1370 1650,1340 2047.24,1340 2047.24,1970 1035,1970 1035,1387.08 1082.08,1340 1349.37,1340 1385,1375.63 1385,1790
PGND on Top "PGND_L01_P019" (solid, remove dead copper, pour order 19): 0,1440 0,1970 650,1970 650,1605 690,1565 725,1565 740,1550 740,1470.63 709.37,1440
GND on Top "GND_L01_P087" (solid, remove dead copper, pour order 87): 1929.37,805 2047.24,805 2047.24,585 1894.37,585 1879.37,600 1879.37,655 1894.37,670 1919.37,670 1929.37,680
AGND on Top "Top-AGND" (solid, remove dead copper, pour order 91): 2047.24,404.17 2047.24,575 1859.37,575 1859.37,500 1844.37,485 1735,485 1720,470 1720,404.17
PGND on Bottom "Bottom-PGND" (solid, remove dead copper, pour order 97): 769.37,1260 885,1260 885,1119.43 911.87,1095 1209.37,1095 1235,1120.63 1235,1240 1250,1255 1320,1255 1384.37,1319.37 1384.37,1789.37 1420,1825 1584.37,1825 1619.37,1790 1619.37,1345 1589.37,1315 1429.37,1315 1364.37,1250 1364.37,1125 1394.37,1095 1904.37,1095 1929.37,1070 1929.37,815 2047.24,815 2047.24,1970 1035,1970 1035,1339.76 1010.24,1315 820,1315 795,1340 795,1535 765,1565 690,1565 650,1605 650,1965 0,1965 0,1260 394.37,1260 404.37,1250 404.37,1117 422.7,1095 729.37,1095 749.37,1115 749.37,1240
W on Bottom "W_L04_P114" (solid, remove dead copper, pour order 114): 1240,180 1240,0 1525,0 1600,75 1600,270 1300,270 1300,240
V on Bottom "V_L04_P113" (solid, remove dead copper, pour order 113): 850,185 850,0 1195,2.48 1195,185 1172.77,207.23 1172.77,270 873.75,270 873.75,208.75
U on Bottom "U_L04_P112" (solid, remove dead copper, pour order 112): 450,270 450,85 535,0 805,0 805,185 753.25,236.75 751.45,270
DCBUS on Bottom "DCBUS_L04_P018" (solid, remove dead copper, pour order 18): 669.37,1970 669.37,1610 694.37,1585 774.37,1585 814.37,1545 814.37,1350.63 835,1330 989.37,1330 1010,1350.63 1010,1970
SH_C on Bottom "SH_C_L04_P104" (solid, remove dead copper, pour order 104): 1308.25,760 1308.25,660 1702.48,660 1702.48,760
SH_B on Bottom "SH_B_L04_P103" (solid, remove dead copper, pour order 103): 826.43,760 826.43,660 1220.65,660 1220.65,760
SH_A on Bottom "SH_A_L04_P101" (solid, remove dead copper, pour order 101): 347.79,760 347.79,660 742.02,660 742.02,760
DCBUS on Bottom "DCBUS_L04_P025" (solid, remove dead copper, pour order 25): 1419.37,1335 1399.37,1355 1399.37,1770 1434.37,1805 1569.37,1805 1604.37,1770 1604.37,1355 1584.37,1335
PGND on Bottom "PGND_L04_P083" (solid, remove dead copper, pour order 83): 1314.37,1260 1394.37,1260 1399.37,1255 1459.37,1315 1359.37,1315
AGND on Bottom "AGND_L04_P064" (solid, remove dead copper, pour order 64): 1864.37,897.95 1864.37,730 1919.37,730 1919.37,897.95
GND on Bottom "GND_L04_P058" (solid, remove dead copper, pour order 58): 2047.24,805 2047.24,585 1929.37,585 1929.37,805
PGND on Gnd "PGND_L02_P024" (solid, remove dead copper, pour order 24): -15.47,1095 2049.37,1095 2049.37,2005 -10.63,2005
W on Gnd "W_L02_P120" (solid, remove dead copper, pour order 120): 1300,270 1300,240 1240,180 1240,0 1525,0 1600,75 1600,270
V on Gnd "V_L02_P119" (solid, remove dead copper, pour order 119): 873.75,270 873.75,208.75 850,185 851.25,183.75 851.25,1.25 1193.77,1.25 1195,2.48 1195,185 1172.55,207.45 1172.55,269.78
U on Gnd "U_L02_P118" (solid, remove dead copper, pour order 118): 450,270 450,85 535,0 805,0 805,185 753.25,236.75 753.25,270
SH_C on Gnd "SH_C_L02_P107" (solid, remove dead copper, pour order 107): 1310,760 1310,645 1340,615 1650,615 1680,645 1680,758.44 1648.44,790 1340,790
SH_B on Gnd "SH_B_L02_P106" (solid, remove dead copper, pour order 106): 836.14,760 836.14,645 866.14,615 1176.14,615 1206.14,645 1206.14,758.44 1174.58,790 866.14,790
SH_A on Gnd "SH_A_L02_P105" (solid, remove dead copper, pour order 105): 380,760 380,645 410,615 720,615 750,645 750,758.44 718.44,790 410,790
AGND on Gnd "AGND_L02_P088" (solid, remove dead copper, pour order 88): 2009.37,585 1939.37,585 1924.37,600 1924.37,854.26 1864.37,854.26 1864.37,600 1849.37,585 469.37,585 449.37,565 449.37,415 464.37,400 2009.37,400
DCBUS on Signal "DCBUS_L03_P077" (solid, remove dead copper, pour order 77): -9.33,865 2047.24,865 2047.24,2005 0.67,2005
W on Signal "W_L03_P117" (solid, remove dead copper, pour order 117): 1300,270 1300,240 1240,180 1240,0 1525,0 1600,75 1600,270
V on Signal "V_L03_P116" (solid, remove dead copper, pour order 116): 873.75,270 873.75,208.75 850,185 850,0 852.5,2.5 1194.48,2.5 1194.48,185.52 1172.55,207.45 1172.55,269.78 1172.77,270
U on Signal "U_L03_P115" (solid, remove dead copper, pour order 115): 450,270 450,85 535,0 805,0 805,185 751.45,238.55 751.45,270

## Silkscreen, mask and mechanical layers (free items; w line width, h text height)
Top Overlay:
  lines w7: 429.37,1318.18 429.37,1259.13 1629.37,1259.13 1629.37,1318.18 ; 429.37,1320 1629.37,1320 ; 759.37,885 759.37,1221.5 809.59,1221.5 809.59,885.22 809.37,885 759.37,885 ; 1237.68,885 1287.68,885 1287.91,885.22 1287.91,1221.5 1237.68,1221.5 1237.68,885
  text "_" at 1301.06,1941.51 h150
  text "+" at 705.78,1881.12 h150
  text "NTC" at 1811.97,816.25 h45
  text "U" at 464.47,86.2 h100
  text "V" at 830.17,85 h100
  text "W" at 1163.01,85 h100
Bottom Overlay:
  drawing of 8 lines, arcs and shapes, not listed
  text "XJRC" at 475.67,1452.17 h180
  text "BLAZER FOC" at 143.2,1036.21 h150 r90
  text "2.2uF" at 1915.5,913.41 h45
  text "Driver" at 268.78,786.98 h120 r90
  text "3.3k" at 1897.58,715.54 h45
  text "0Ω" at 1984.85,715.54 h45
  text "0.1uF" at 650.77,600.54 h45
  text "0.1uF" at 1070.77,600.54 h45
  text "0.1uF" at 1500.77,600.54 h45
  text "V2.0" at 264.04,331.85 h80 r90
Top Solder:
  region: 1469.37,1330 1469.37,1800 1524.37,1800 1524.37,1330
  region: 1242.8,1215 1282.8,1215 1282.8,890 1242.8,890
  region: 764.37,1215 804.37,1215 804.37,890 764.37,890
  region: 429.37,1315 429.37,1265 1629.37,1265 1629.37,1315
Bottom Solder:
  region: 434.37,1315 434.37,1260 1624.37,1260 1624.37,1315
Mechanical 1:
  the board outline again, w10